# Altium PCB RockRTK.PcbDoc (part 3 of 8)
Units mm, origin at the board's own origin, x right, y up, seen from the top; angles counter-clockwise.
Board outline 128 x 72 mm, 6 copper layers (Top Layer, MidLayer1GND, MidLayer2SIG, MidLayer3PWR, MidLayer4GND, Bottom Layer), stack 1.538 mm thick; 400 components, 307 nets, 1795 pads, 1243 vias.
Unrouted connection lines stored in the file: 522.
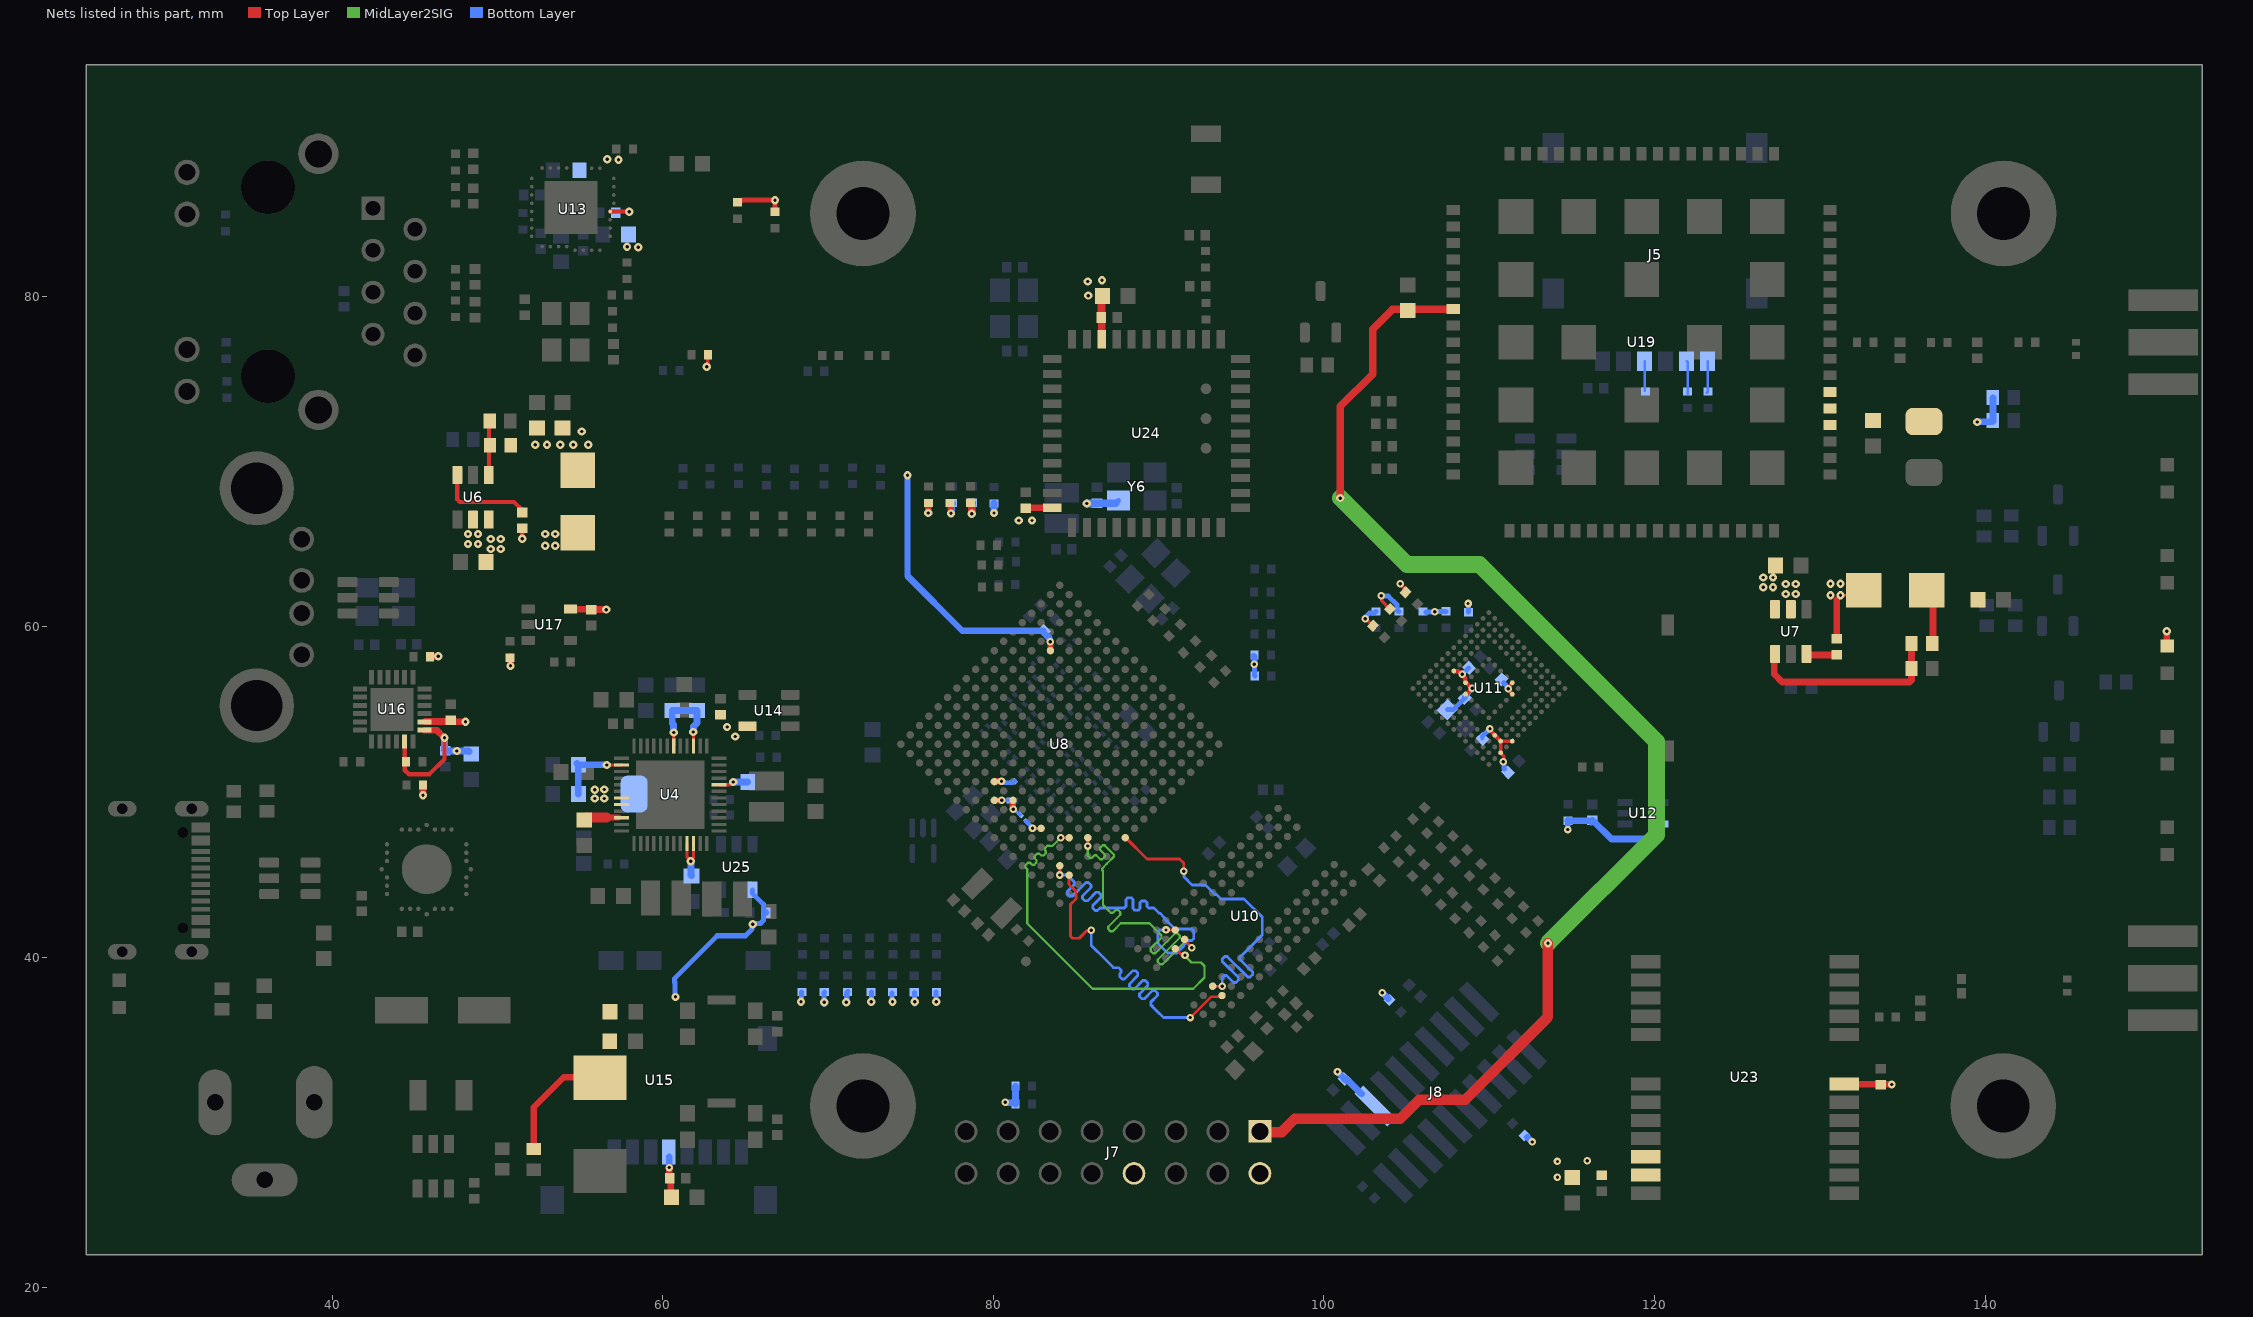
[diagram p6: the nets of this part, all layers, seen from the top]

## Via types
v1: diameter 0.5, hole 0.2, Top Layer to Bottom Layer, tented both sides, 532 vias
v2: diameter 0.457, hole 0.203, Top Layer to Bottom Layer, tented both sides, 414 vias
v3: diameter 0.5, hole 0.2, Top Layer to Bottom Layer, 233 vias
v4: diameter 0.7, hole 0.3, Top Layer to Bottom Layer, 32 vias
v5: diameter 0.457, hole 0.2, Top Layer to Bottom Layer, tented both sides, 30 vias
v6: diameter 0.7, hole 0.3, Top Layer to Bottom Layer, tented both sides, 2 vias

## Nets (pads, with @x,y where several pads share a name; then routed paths per layer and width w, separated by ;. In a path a pad name is that pad's centre, name@x,y a point inside that pad or via, vN(x,y) a via of type N, cw(c..) or ccw(c..) an arc to the next point about the centre after c; other vN are vias at no path point) (continued)
3V7_DC_SW: (continued)
  other v1: 130.65,61.9 127.95,61.975 128.55,61.975 127.95,62.575 128.55,62.575 130.65,62.6 131.25,62.6
5V_SYS: C5.1 C6.1 C11.1 C12.1 C13.1 C14.1 C15.1 C29.1 C33.1 C130.1 C131.1 C132.1 C136.1 C163.1 J7.01 R90.1 R91.1 U4.2 U4.7 U4.8 U4.21 U4.22 U4.32 U4.39 U4.42 U6.3 U7.3 U8.P15 U16.17 U16.19 U17.5 U19.24 | length 125.9
  Top Layer w0.203: v1(56.625,51.625) 56.632,51.632 57.519,51.632 U4.2@57.52,51.634 ; U4.42@60.67,52.784 60.672,52.786 60.672,53.597 v1(60.675,53.6) ; U4.21@61.47,46.884 61.47,46.067 61.7,45.838 v1(61.7,45.8) ; v1@61.7,45.88 61.87,46.05 U4.22@61.87,46.884 ; v1(61.85,53.625) 61.869,53.606 61.869,52.786 U4.39@61.87,52.784 ; U4.22@61.869,46.536 U4.22@61.87,46.537 ; U4.32@63.42,50.434 64.109,50.434 v1(64.275,50.6)
  Top Layer w0.254: U16.17@44.39,53.038 44.395,53.033 44.395,51.83 44.4,51.825 44.4,51.313 44.638,51.075 45.9,51.075 46.8,51.975 v1@46.8,53.25
  Top Layer w0.381: U8.P15@83.469,58.606 v2@83.469,59.056
  Top Layer w0.406: U16.19@45.59,53.738 46.327,53.738 46.79,53.275 v1(46.8,53.275) ; R90.1@45.938,58.14 45.938,58.153 45.972,58.187 46.412,58.187 v1(46.425,58.2) ; U17.5@54.422,61.07 54.442,61.05 55.652,61.05 C132.1@55.672,61.03 v1(56.587,61.03)
  Top Layer w0.457: v1(101,67.775) 101,73.325 102.95,75.275 102.95,78 104.155,79.205 U19.24@107.825,79.205
  Top Layer w0.635: J7.01@96.15,29.425 97.448,29.425 98.24,30.217 104.623,30.217 105.782,31.377 108.552,31.377 113.56,36.385 v1(113.56,40.849)
  MidLayer2SIG w1.016: v1(101,67.775) 105.025,63.75 109.425,63.75 120.125,53.05 120.125,47.4 v1@113.575,40.85
  Bottom Layer w0.381: v1@74.81,69.126 74.81,63.065 78.121,59.754 82.911,59.754 82.918,59.761 83.039,59.761 83.046,59.754 83.046,59.641 83.435,59.252 83.435,59.09 v2(83.45,59.075)
  Bottom Layer w0.406: v1@46.8,53.25 46.8,52.53 C130.1@46.85,52.48 ; C130.1@46.875,52.475 v1(47.55,52.475) 48.275,52.475 C131.1@48.3,52.45 ; C11.1@54.825,51.725 54.912,51.638 56.612,51.638 v1(56.625,51.625) ; C5.1@54.9,49.875 C11.1@54.9,51.65 ; v1(60.675,53.6) 60.657,53.618 60.657,54.078 60.575,54.16 C12.1@60.575,54.925 C13.1@62.075,54.925 62.075,54.175 61.868,53.968 61.868,53.643 v1(61.85,53.625) ; v1(61.7,45.8) 61.718,45.782 61.718,44.957 C15.1@61.75,44.925 ; v1(64.275,50.6) C14.1@65.15,50.6
  other v1: 55.9,49.6 56.475,49.6 55.9,50.125 56.475,50.15 126.575,62.375 127.175,62.375 126.575,62.975 127.175,62.975 49.6,64.7 50.2,64.7 49.6,65.3 50.2,65.3 74.811,69.157
5VIN: C8.1 C26.1 C27.1 L4.2 R4.2 U4.10 | length 9.5
  Top Layer w0.381: R4.2@52.2,28.4 52.2,30.925 54.015,32.74 L4.2@56.275,32.74 ; 56.62,48.45 U4.10@57.31,48.45
  Top Layer w0.6: C8.1@55.25,48.3 55.4,48.45 56.62,48.45
CAP_VBB_MPU: C85.1 U8.C10 | length 0.8
  Top Layer w0.381: U8.C10@80.106,49.481 80.11,49.485 80.51,49.485 v2(80.525,49.5)
  Bottom Layer w0.203: v2@80.526,49.501 v2(80.525,49.5) C85.1@80.925,49.5
CAP_VDD_RTC: C84.1 U8.D6 | length 1
  Top Layer w0.169: v2@82.4,47.8 82.404,47.796 U8.D6@82.895,47.796
  Bottom Layer w0.279: C84.1@82.01,48.21 82.01,48.189 v2@82.35,47.85
  other v2: 82.375,47.8
CAP_VDD_SRAM_CORE: C83.1 U8.D9 | length 1
  Top Layer w0.381: v2@81.181,48.969 U8.D9@81.181,49.419
  Bottom Layer w0.203: v2@81.275,48.95 81.275,48.944 81.317,48.901 81.326,48.901 81.618,48.609 C83.1@81.651,48.609
  other v2: 81.2,48.95
CAP_VDD_SRAM_MPU: C82.1 U8.D11 | length 1.3
  Top Layer w0.381: U8.D11@80.081,50.608 80.081,50.62 80.098,50.637 80.487,50.637 v2(80.5,50.65)
  Bottom Layer w0.279: v2@80.575,50.625 80.575,50.623 80.582,50.616 80.584,50.616 80.655,50.545 81.153,50.545 81.263,50.656 81.284,50.656 C82.1@81.299,50.641
CON_SIM_CLK: J5.C3 R106.1 | length 2
  Bottom Layer w0.152: J5.C3@121.943,76.057 122.025,75.975 R106.1@122.025,74.1
CON_SIM_DATA: J5.C7 R107.1 | length 1.9
  Bottom Layer w0.152: R107.1@123.175,74.15 123.213,74.188 J5.C7@123.213,76.057
CON_SIM_RST: J5.C2 R105.1 | length 1.8
  Bottom Layer w0.152: J5.C2@119.403,76.057 119.425,76.035 R105.1@119.425,74.275
DDR3L_A0: U8.F3 U10.N3 | length 23.2
  Top Layer w0.169: v2@85.73,46.73 U8.F3@85.73,47.296 ; U10.N3@91.605,41.021 91.605,41.011 92,40.615 v2(92,40.575)
  MidLayer2SIG w0.139: v2@85.775,46.675 85.725,46.625 85.725,46.125 85.8,46.05 85.849,46.001 85.96,46.001 86.127,46.168 86.238,46.168 86.477,45.928 86.589,45.928 86.755,46.094 86.755,46.205 86.46,46.501 86.46,46.612 86.626,46.778 86.737,46.778 87.31,46.205 87.31,46.094 86.866,45.65 86.589,45.373 86.589,45.261 86.638,45.213 86.638,43.163 86.925,42.875 86.974,42.826 87.109,42.691 87.248,42.691 87.41,42.853 87.549,42.853 87.687,42.715 87.687,42.576 86.953,41.841 86.953,41.702 87.092,41.563 87.23,41.563 87.717,42.05 87.954,42.05 89.451,42.05 89.613,41.888 89.662,41.839 89.837,41.663 89.837,41.662 90.179,41.32 90.179,41.181 89.521,40.523 89.521,40.384 89.659,40.245 89.798,40.245 91.01,41.457 91.149,41.457 91.287,41.318 91.287,41.179 89.957,39.849 89.957,39.71 90.096,39.571 90.235,39.571 91.55,40.886 91.688,40.886 91.737,40.838 v2(92,40.575)
  other v2: 85.725,46.725
DDR3L_A1: U8.H1 U10.P7 | length 21.6
  Top Layer w0.169: U8.H1@87.986,47.23 88.019,47.23 89.3,45.95 91.277,45.95 91.525,45.702 v2(91.525,45.2) ; U10.P7@93.266,38.237 93.279,38.25 v2(93.85,38.25)
  Bottom Layer w0.169: v2(91.525,45.2) 91.534,45.191 91.534,44.866 92.035,44.365 92.835,44.365 93.41,43.79 93.507,43.79 93.773,43.525 95.175,43.525 96.275,42.425 96.275,41.35 95.125,40.2 94.994,40.069 94.934,40.009 94.934,39.86 95.694,39.1 95.694,38.951 95.544,38.801 95.394,38.801 94.153,40.043 94.003,40.043 93.853,39.893 93.853,39.743 94.828,38.769 94.828,38.619 94.678,38.47 94.528,38.47 94.105,38.893 93.956,38.893 93.85,38.787 93.85,38.627 v2(93.85,38.25)
DDR3L_A2: U8.E4 U10.P3 | length 23.3
  Top Layer w0.169: v2(84.075,47.225) 84.078,47.228 84.589,47.228 U8.E4@84.592,47.23 ; U10.P3@90.997,40.481 91.094,40.481 91.094,40.444 91.357,40.18 91.545,40.18 v2(91.6,40.125)
  MidLayer2SIG w0.139: v2(84.075,47.225) 83.837,46.987 83.574,46.724 83.435,46.724 83.412,46.747 83.273,46.747 83.134,46.608 83.134,46.47 83.177,46.427 83.177,46.288 83.038,46.149 82.899,46.149 82.786,46.262 82.647,46.262 82.509,46.124 82.509,45.985 82.622,45.872 82.622,45.733 82.483,45.594 82.344,45.594 82.231,45.707 82.092,45.707 81.954,45.568 81.954,45.43 82.05,45.333 82.05,45.096 82.05,42.05 86,38.1 92.094,38.1 92.775,38.781 92.775,39.469 92.569,39.675 92,39.675 91.6,40.075 v2(91.6,40.125)
DDR3L_A3: U8.C3 U10.N2 | length 21.7
  Top Layer w0.169: v2@84.03,44.98 U8.C3@84.03,45.546 ; v2@90.455,41.645 U10.N2@91.021,41.645
  Bottom Layer w0.169: v2(84.025,44.975) 84.475,44.975 84.538,44.912 84.897,44.553 84.897,44.403 84.483,43.988 84.483,43.839 84.632,43.689 84.782,43.689 85.62,44.526 85.769,44.526 85.919,44.377 85.919,44.227 85.404,43.712 85.404,43.562 85.553,43.412 85.703,43.412 86.218,43.928 86.368,43.928 86.518,43.778 86.518,43.629 86.016,43.127 86.016,42.978 86.166,42.828 86.316,42.828 86.463,42.975 87.278,42.975 87.838,42.975 87.923,42.975 88.029,43.081 88.029,43.495 88.135,43.6 88.346,43.6 88.452,43.495 88.452,42.948 88.558,42.842 88.769,42.842 88.875,42.948 88.875,43.304 88.981,43.41 89.193,43.41 89.299,43.304 89.299,43.079 89.404,42.973 89.64,42.973 89.725,42.973 90.032,42.665 90.082,42.665 90.34,42.407 90.34,42.357 90.998,41.7 92.026,41.7 92.125,41.601 92.125,41.125 92.015,41.015 91.818,41.015 91.517,40.714 91.517,40.664 91.102,40.25 90.55,40.25 89.975,40.825 89.975,41.525 90.1,41.65 v2(90.45,41.65)
DDR3L_A4: U8.C2 U10.P8 | length 21.6
  Top Layer w0.169: U8.C2@84.592,44.967 84.592,44.4 85,43.991 85,43.525 84.683,43.208 84.683,41.267 84.8,41.15 85.2,41.15 85.628,41.578 85.878,41.578 v2(85.925,41.625) ; v2(91.925,36.35) 91.939,36.35 93.202,37.613 93.601,37.613 93.618,37.63 93.787,37.63 U10.P8@93.841,37.684
  Bottom Layer w0.169: v2(85.925,41.625) 85.925,40.725 86.786,39.864 86.846,39.804 87.281,39.369 87.431,39.369 87.581,39.369 87.73,39.219 87.73,39.069 87.648,38.987 87.648,38.837 87.798,38.688 87.947,38.688 88.446,39.186 88.595,39.186 88.745,39.036 88.745,38.887 88.242,38.383 88.242,38.234 88.392,38.084 88.541,38.084 89.044,38.587 89.194,38.587 89.344,38.438 89.344,38.288 88.841,37.785 88.841,37.635 88.99,37.486 89.14,37.486 89.643,37.989 89.793,37.989 89.942,37.839 89.942,37.689 89.526,37.273 89.526,37.124 89.826,36.824 89.885,36.765 90.3,36.35 v2(91.925,36.35)